# EAGLE board MRCS-RJ45-CMRI-ARRAY (EAGLE 7.7.0)
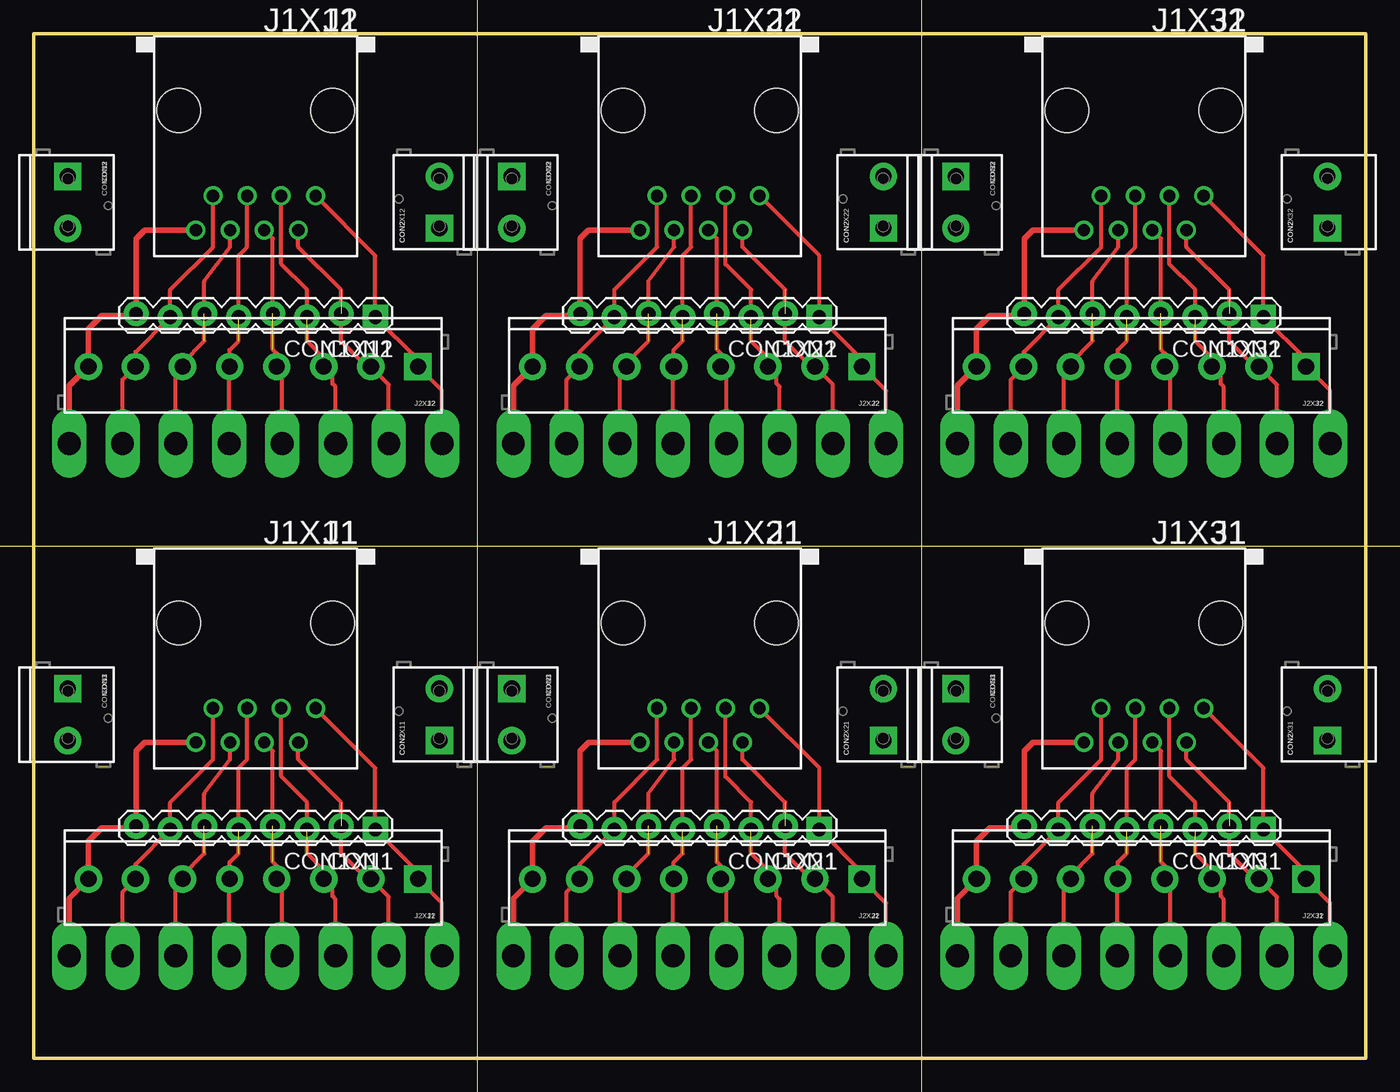
[diagram p0: board, top side]
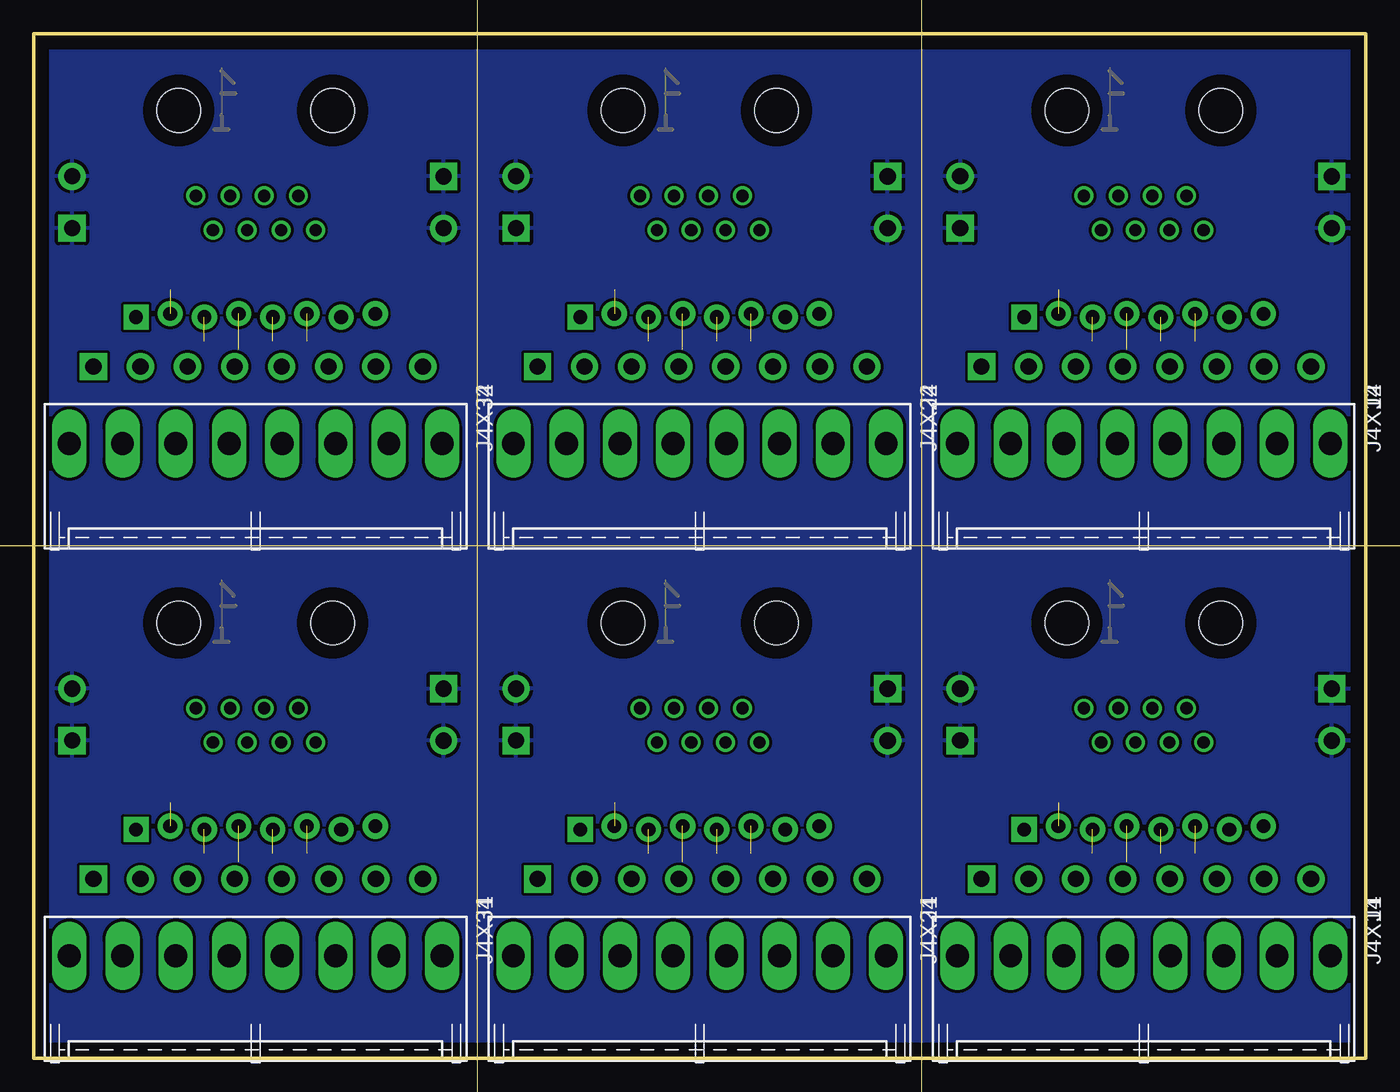
[diagram p1: board, bottom side, seen from below]

Size 99.06 x 76.2 mm. Coordinates in mm from the lower left corner, seen from the top.
Outline: 0,0 99.06,0 99.06,76.2 0,76.2 0,0
Copper layers (1*16): Top 0.035mm / dielectric 1.5mm / Bottom 0.035mm
Design rules "default": minimum track width 10mil, minimum drill 24mil, track to track 8mil, track to pad 8mil, pad to pad 8mil, via to via 8mil, smd to smd 8mil, copper to edge 40mil, drill to drill 8mil, minimum pad ring 10mil, minimum via ring 8mil, stop-mask expansion 4mil, vias tented up to drill 0mil, thermal gap 10mil
Milling: 3 lines

## Footprints (pad centres in the part's own frame; a part is rotated, then mirrored left to right if it is on the bottom)
1X08_LOCK = drill 1.016 pad 1.88 square: 1 0,0.127 | drill 1.016 pad 1.88: 2 2.54,-0.127; 3 5.08,0.127; 4 7.62,-0.127; 5 10.16,0.127; 6 12.7,-0.127; 7 15.24,0.127; 8 17.78,-0.127
SCREWTERMINAL-3.5MM-2_LOCK = drill 1.2 pad 2.032 square: 1 -0.178,0 | drill 1.2 pad 2.032: 2 3.678,0
RJ45-NO-SHIELD = drill 0.9 pad 1.4: 1 -4.445,6.35; 2 -3.175,8.89; 3 -1.905,6.35; 4 -0.635,8.89; 5 0.635,6.35; 6 1.905,8.89; 7 3.175,6.35; 8 4.445,8.89 | hole 3.251: -5.715,0; 5.715,0
SCREWTERMINAL-3.5MM-8 = drill 1.2 pad 2.032 square: 1 0,0 | drill 1.2 pad 2.032: 2 3.5,0; 3 7,0; 4 10.5,0; 5 14,0; 6 17.5,0; 7 21,0; 8 24.5,0
KK-156-8-F = drill 1.7 pad 2.184 long: 1 -13.86,0; 2 -9.9,0; 3 -5.94,0; 4 -1.98,0; 5 1.98,0; 6 5.94,0; 7 9.9,0; 8 13.86,0

## Placement (x,y rotation side)
CON1X11  [1X08_LOCK]  25.4,17.14 180 top
CON1X12  [1X08_LOCK]  25.4,55.24 180 top
CON1X21  [1X08_LOCK]  58.42,17.14 180 top
CON1X22  [1X08_LOCK]  58.42,55.24 180 top
CON1X31  [1X08_LOCK]  91.44,17.14 180 top
CON1X32  [1X08_LOCK]  91.44,55.24 180 top
CON2X11  [SCREWTERMINAL-3.5MM-2_LOCK]  30.16,23.81 90 top
CON2X12  [SCREWTERMINAL-3.5MM-2_LOCK]  30.16,61.91 90 top
CON2X21  [SCREWTERMINAL-3.5MM-2_LOCK]  63.18,23.81 90 top
CON2X22  [SCREWTERMINAL-3.5MM-2_LOCK]  63.18,61.91 90 top
CON2X31  [SCREWTERMINAL-3.5MM-2_LOCK]  96.2,23.81 90 top
CON2X32  [SCREWTERMINAL-3.5MM-2_LOCK]  96.2,61.91 90 top
CON3X11  [SCREWTERMINAL-3.5MM-2_LOCK]  2.54,27.3 270 top
CON3X12  [SCREWTERMINAL-3.5MM-2_LOCK]  2.54,65.41 270 top
CON3X21  [SCREWTERMINAL-3.5MM-2_LOCK]  35.56,27.3 270 top
CON3X22  [SCREWTERMINAL-3.5MM-2_LOCK]  35.56,65.41 270 top
CON3X31  [SCREWTERMINAL-3.5MM-2_LOCK]  68.58,27.3 270 top
CON3X32  [SCREWTERMINAL-3.5MM-2_LOCK]  68.58,65.41 270 top
J1X11  [RJ45-NO-SHIELD]  16.51,32.38 180 top
J1X12  [RJ45-NO-SHIELD]  16.51,70.48 180 top
J1X21  [RJ45-NO-SHIELD]  49.53,32.38 180 top
J1X22  [RJ45-NO-SHIELD]  49.53,70.48 180 top
J1X31  [RJ45-NO-SHIELD]  82.55,32.38 180 top
J1X32  [RJ45-NO-SHIELD]  82.55,70.48 180 top
J2X11  [SCREWTERMINAL-3.5MM-8]  28.57,13.34 180 top
J2X12  [SCREWTERMINAL-3.5MM-8]  28.57,51.44 180 top
J2X21  [SCREWTERMINAL-3.5MM-8]  61.59,13.34 180 top
J2X22  [SCREWTERMINAL-3.5MM-8]  61.59,51.44 180 top
J2X31  [SCREWTERMINAL-3.5MM-8]  94.61,13.34 180 top
J2X32  [SCREWTERMINAL-3.5MM-8]  94.61,51.44 180 top
J4X11  [KK-156-8-F]  16.51,7.62 180 bottom
J4X12  [KK-156-8-F]  16.51,45.72 180 bottom
J4X21  [KK-156-8-F]  49.53,7.62 180 bottom
J4X22  [KK-156-8-F]  49.53,45.72 180 bottom
J4X31  [KK-156-8-F]  82.55,7.62 180 bottom
J4X32  [KK-156-8-F]  82.55,45.72 180 bottom
U$1X11  [MRCSLOGOBTM]  12.7,30.48 0 top
U$1X12  [MRCSLOGOBTM]  12.7,68.58 0 top
U$1X21  [MRCSLOGOBTM]  45.72,30.48 0 top
U$1X22  [MRCSLOGOBTM]  45.72,68.58 0 top
U$1X31  [MRCSLOGOBTM]  78.74,30.48 0 top
U$1X32  [MRCSLOGOBTM]  78.74,68.58 0 top

## Library data of the parts
CON1X11 CON1X12 CON1X21 CON1X22 CON1X31 CON1X32 CON2X11 CON2X12 CON2X21 CON2X22 CON2X31 CON2X32 CON3X11 CON3X12 CON3X21 CON3X22 CON3X31 CON3X32 J1X11 J1X12 J1X21 J1X22 J1X31 J1X32 J2X11 J2X12 J2X21 J2X22 J2X31 J2X32 J4X11 J4X12 J4X21 J4X22 J4X31 J4X32 = SPCoast
U$1X11 U$1X12 U$1X21 U$1X22 U$1X31 U$1X32 = MRCSLogoBtm

## Nets
GNDX11: CON2X11.1 CON2X11.2 CON3X11.1 CON3X11.2
GNDX12: CON2X12.1 CON2X12.2 CON3X12.1 CON3X12.2
GNDX21: CON2X21.1 CON2X21.2 CON3X21.1 CON3X21.2
GNDX22: CON2X22.1 CON2X22.2 CON3X22.1 CON3X22.2
GNDX31: CON2X31.1 CON2X31.2 CON3X31.1 CON3X31.2
GNDX32: CON2X32.1 CON2X32.2 CON3X32.1 CON3X32.2
L1X11: CON1X11.1 J1X11.1 J2X11.1 J4X11.8
L1X12: CON1X12.1 J1X12.1 J2X12.1 J4X12.8
L1X21: CON1X21.1 J1X21.1 J2X21.1 J4X21.8
L1X22: CON1X22.1 J1X22.1 J2X22.1 J4X22.8
L1X31: CON1X31.1 J1X31.1 J2X31.1 J4X31.8
L1X32: CON1X32.1 J1X32.1 J2X32.1 J4X32.8
L2X11: CON1X11.2 J1X11.2 J2X11.2 J4X11.7
L2X12: CON1X12.2 J1X12.2 J2X12.2 J4X12.7
L2X21: CON1X21.2 J1X21.2 J2X21.2 J4X21.7
L2X22: CON1X22.2 J1X22.2 J2X22.2 J4X22.7
L2X31: CON1X31.2 J1X31.2 J2X31.2 J4X31.7
L2X32: CON1X32.2 J1X32.2 J2X32.2 J4X32.7
L3X11: CON1X11.3 J1X11.3 J2X11.3 J4X11.6
L3X12: CON1X12.3 J1X12.3 J2X12.3 J4X12.6
L3X21: CON1X21.3 J1X21.3 J2X21.3 J4X21.6
L3X22: CON1X22.3 J1X22.3 J2X22.3 J4X22.6
L3X31: CON1X31.3 J1X31.3 J2X31.3 J4X31.6
L3X32: CON1X32.3 J1X32.3 J2X32.3 J4X32.6
L4X11: CON1X11.4 J1X11.4 J2X11.4 J4X11.5
L4X12: CON1X12.4 J1X12.4 J2X12.4 J4X12.5
L4X21: CON1X21.4 J1X21.4 J2X21.4 J4X21.5
L4X22: CON1X22.4 J1X22.4 J2X22.4 J4X22.5
L4X31: CON1X31.4 J1X31.4 J2X31.4 J4X31.5
L4X32: CON1X32.4 J1X32.4 J2X32.4 J4X32.5
L5X11: CON1X11.5 J1X11.5 J2X11.5 J4X11.4
L5X12: CON1X12.5 J1X12.5 J2X12.5 J4X12.4
L5X21: CON1X21.5 J1X21.5 J2X21.5 J4X21.4
L5X22: CON1X22.5 J1X22.5 J2X22.5 J4X22.4
L5X31: CON1X31.5 J1X31.5 J2X31.5 J4X31.4
L5X32: CON1X32.5 J1X32.5 J2X32.5 J4X32.4
L6X11: CON1X11.6 J1X11.6 J2X11.6 J4X11.3
L6X12: CON1X12.6 J1X12.6 J2X12.6 J4X12.3
L6X21: CON1X21.6 J1X21.6 J2X21.6 J4X21.3
L6X22: CON1X22.6 J1X22.6 J2X22.6 J4X22.3
L6X31: CON1X31.6 J1X31.6 J2X31.6 J4X31.3
L6X32: CON1X32.6 J1X32.6 J2X32.6 J4X32.3
L7X11: CON1X11.7 J1X11.7 J2X11.7 J4X11.2
L7X12: CON1X12.7 J1X12.7 J2X12.7 J4X12.2
L7X21: CON1X21.7 J1X21.7 J2X21.7 J4X21.2
L7X22: CON1X22.7 J1X22.7 J2X22.7 J4X22.2
L7X31: CON1X31.7 J1X31.7 J2X31.7 J4X31.2
L7X32: CON1X32.7 J1X32.7 J2X32.7 J4X32.2
L8X11: CON1X11.8 J1X11.8 J2X11.8 J4X11.1
L8X12: CON1X12.8 J1X12.8 J2X12.8 J4X12.1
L8X21: CON1X21.8 J1X21.8 J2X21.8 J4X21.1
L8X22: CON1X22.8 J1X22.8 J2X22.8 J4X22.1
L8X31: CON1X31.8 J1X31.8 J2X31.8 J4X31.1
L8X32: CON1X32.8 J1X32.8 J2X32.8 J4X32.1

## Tracks (layer width: path | path; a pad name or v marks a point on that pad's centre or on a via)
GNDX11
  pour Bottom: 0,0 33.02,0 33.02,38.1 0,38.1
GNDX12
  pour Bottom: 0,38.1 33.02,38.1 33.02,76.2 0,76.2
GNDX21
  pour Bottom: 33.02,0 66.04,0 66.04,38.1 33.02,38.1
GNDX22
  pour Bottom: 33.02,38.1 66.04,38.1 66.04,76.2 33.02,76.2
GNDX31
  pour Bottom: 66.04,0 99.06,0 99.06,38.1 66.04,38.1
GNDX32
  pour Bottom: 66.04,38.1 99.06,38.1 99.06,76.2 66.04,76.2
L1X11
  Top 0.305: J4X11.8 30.37,11.54 J2X11.1 28.57,13.84 CON1X11.1 25.4,21.59 J1X11.1
L1X12
  Top 0.305: J4X12.8 30.37,49.64 J2X12.1 28.57,51.94 CON1X12.1 25.4,59.69 J1X12.1
L1X21
  Top 0.305: J4X21.8 63.39,11.54 J2X21.1 61.59,13.84 CON1X21.1 58.42,21.59 J1X21.1
L1X22
  Top 0.305: J4X22.8 63.39,49.64 J2X22.1 61.59,51.94 CON1X22.1 58.42,59.69 J1X22.1
L1X31
  Top 0.305: J4X31.8 96.41,11.54 J2X31.1 94.61,13.84 CON1X31.1 91.44,21.59 J1X31.1
L1X32
  Top 0.305: J4X32.8 96.41,49.64 J2X32.1 94.61,51.94 CON1X32.1 91.44,59.69 J1X32.1
L2X11  (1 unrouted)
  Top 0.305: J4X11.7 26.41,12 J2X11.2 24.77,13.34 22.86,15.24 22.86,19.05 19.68,22.23 J1X11.2
L2X12  (1 unrouted)
  Top 0.305: J4X12.7 26.41,50.1 J2X12.2 24.77,51.44 22.86,53.34 22.86,57.15 19.68,60.33 J1X12.2
L2X21  (1 unrouted)
  Top 0.305: J4X21.7 59.43,12 J2X21.2 57.78,13.34 55.88,15.24 55.88,19.05 52.7,22.23 J1X21.2
L2X22  (1 unrouted)
  Top 0.305: J4X22.7 59.43,50.1 J2X22.2 57.78,51.44 55.88,53.34 55.88,57.15 52.7,60.33 J1X22.2
L2X31  (1 unrouted)
  Top 0.305: J4X31.7 92.45,12 J2X31.2 90.81,13.34 88.9,15.24 88.9,19.05 85.72,22.23 J1X31.2
L2X32  (1 unrouted)
  Top 0.305: J4X32.7 92.45,50.1 J2X32.2 90.81,51.44 88.9,53.34 88.9,57.15 85.72,60.33 J1X32.2
L3X11  (1 unrouted)
  Top 0.305: J4X11.6 22.45,11.84 22.23,12.06 22.23,12.69 J2X11.3 21.57,13.98 20.32,15.24 20.32,19.05 18.41,20.95 J1X11.3
L3X12  (1 unrouted)
  Top 0.305: J4X12.6 22.45,49.94 22.23,50.16 22.23,50.78 J2X12.3 21.57,52.09 20.32,53.34 20.32,57.15 18.41,59.05 J1X12.3
L3X21  (1 unrouted)
  Top 0.305: J4X21.6 55.47,11.84 55.24,12.06 55.24,12.69 J2X21.3 54.59,13.98 53.34,15.24 53.34,19.05 51.44,20.95 J1X21.3
L3X22  (1 unrouted)
  Top 0.305: J4X22.6 55.47,49.94 55.24,50.16 55.24,50.78 J2X22.3 54.59,52.09 53.34,53.34 53.34,57.15 51.44,59.05 J1X22.3
L3X31  (1 unrouted)
  Top 0.305: J4X31.6 88.49,11.84 88.27,12.06 88.27,12.69 J2X31.3 87.61,13.98 86.36,15.24 86.36,19.05 84.45,20.95 J1X31.3
L3X32  (1 unrouted)
  Top 0.305: J4X32.6 88.49,49.94 88.27,50.16 88.27,50.78 J2X32.3 87.61,52.09 86.36,53.34 86.36,57.15 84.45,59.05 J1X32.3
L4X11  (1 unrouted)
  Top 0.305: J4X11.5 18.49,12.92 J2X11.4 18.07,14.31 17.78,14.61 17.78,22.86 J1X11.4
L4X12  (1 unrouted)
  Top 0.305: J4X12.5 18.49,51.02 J2X12.4 18.07,52.41 17.78,52.7 17.78,60.96 J1X12.4
L4X21  (1 unrouted)
  Top 0.305: J4X21.5 51.51,12.92 J2X21.4 51.09,14.31 50.8,14.61 50.8,22.86 J1X21.4
L4X22  (1 unrouted)
  Top 0.305: J4X22.5 51.51,51.02 J2X22.4 51.09,52.41 50.8,52.7 50.8,60.96 J1X22.4
L4X31  (1 unrouted)
  Top 0.305: J4X31.5 84.53,12.92 J2X31.4 84.11,14.31 83.82,14.61 83.82,22.86 J1X31.4
L4X32  (1 unrouted)
  Top 0.305: J4X32.5 84.53,51.02 J2X32.4 84.11,52.41 83.82,52.7 83.82,60.96 J1X32.4
L5X11  (1 unrouted)
  Top 0.305: J4X11.4 14.53,13.29 J2X11.5 14.57,14.57 15.24,15.24 15.24,21.59 15.88,22.23 J1X11.5
L5X12  (1 unrouted)
  Top 0.305: J4X12.4 14.53,51.39 J2X12.5 14.57,52.67 15.24,53.34 15.24,59.69 15.88,60.33 J1X12.5
L5X21  (1 unrouted)
  Top 0.305: J4X21.4 47.55,13.29 J2X21.5 47.59,14.57 48.26,15.24 48.26,21.59 48.9,22.23 J1X21.5
L5X22  (1 unrouted)
  Top 0.305: J4X22.4 47.55,51.39 J2X22.5 47.59,52.67 48.26,53.34 48.26,59.69 48.9,60.33 J1X22.5
L5X31  (1 unrouted)
  Top 0.305: J4X31.4 80.57,13.29 J2X31.5 80.61,14.57 81.28,15.24 81.28,21.59 81.92,22.23 J1X31.5
L5X32  (1 unrouted)
  Top 0.305: J4X32.4 80.57,51.39 J2X32.5 80.61,52.67 81.28,53.34 81.28,59.69 81.92,60.33 J1X32.5
L6X11  (1 unrouted)
  Top 0.305: J4X11.3 10.57,12.83 J2X11.6 11.07,13.62 12.7,15.24 12.7,19.68 14.61,22.23 J1X11.6
L6X12  (1 unrouted)
  Top 0.305: J4X12.3 10.57,50.93 J2X12.6 11.07,51.72 12.7,53.34 12.7,57.78 14.61,60.33 J1X12.6
L6X21  (1 unrouted)
  Top 0.305: J4X21.3 43.59,12.83 J2X21.6 44.09,13.62 45.72,15.24 45.72,19.68 47.62,22.23 J1X21.6
L6X22  (1 unrouted)
  Top 0.305: J4X22.3 43.59,50.93 J2X22.6 44.09,51.72 45.72,53.34 45.72,57.78 47.62,60.33 J1X22.6
L6X31  (1 unrouted)
  Top 0.305: J4X31.3 76.61,12.83 J2X31.6 77.11,13.62 78.74,15.24 78.74,19.68 80.64,22.23 J1X31.6
L6X32  (1 unrouted)
  Top 0.305: J4X32.3 76.61,50.93 J2X32.6 77.11,51.72 78.74,53.34 78.74,57.78 80.64,60.33 J1X32.6
L7X11
  Top 0.305: J4X11.2 6.61,12.37 J2X11.7 7.58,14.43 CON1X11.7 10.16,19.05 13.34,22.23 J1X11.7
L7X12
  Top 0.305: J4X12.2 6.61,50.47 J2X12.7 7.58,52.53 CON1X12.7 10.16,57.15 13.34,60.33 J1X12.7
L7X21
  Top 0.305: J4X21.2 39.63,12.37 J2X21.7 40.59,14.43 CON1X21.7 43.18,19.05 46.35,22.23 J1X21.7
L7X22
  Top 0.305: J4X22.2 39.63,50.47 J2X22.7 40.59,52.53 CON1X22.7 43.18,57.15 46.35,60.33 J1X22.7
L7X31
  Top 0.305: J4X31.2 72.65,12.37 J2X31.7 73.61,14.43 CON1X31.7 76.2,19.05 79.38,22.23 J1X31.7
L7X32
  Top 0.305: J4X32.2 72.65,50.47 J2X32.7 73.61,52.53 CON1X32.7 76.2,57.15 79.38,60.33 J1X32.7
L8X11
  Top 0.305: 11.43,23.5 J1X11.8
  Top 0.406: J4X11.1 2.65,11.91 J2X11.8 4.08,16.14 5.08,17.14 7.49,17.14 CON1X11.8 7.62,22.86 8.26,23.5 J1X11.8
L8X12
  Top 0.305: 11.43,61.59 J1X12.8
  Top 0.406: J4X12.1 2.65,50.01 J2X12.8 4.08,54.24 5.08,55.24 7.49,55.24 CON1X12.8 7.62,60.96 8.26,61.59 J1X12.8
L8X21
  Top 0.305: 44.45,23.5 J1X21.8
  Top 0.406: J4X21.1 35.67,11.91 J2X21.8 37.09,16.14 38.1,17.14 40.51,17.14 CON1X21.8 40.64,22.86 41.27,23.5 J1X21.8
L8X22
  Top 0.305: 44.45,61.59 J1X22.8
  Top 0.406: J4X22.1 35.67,50.01 J2X22.8 37.09,54.24 38.1,55.24 40.51,55.24 CON1X22.8 40.64,60.96 41.27,61.59 J1X22.8
L8X31
  Top 0.305: 77.47,23.5 J1X31.8
  Top 0.406: J4X31.1 68.69,11.91 J2X31.8 70.11,16.14 71.12,17.14 73.53,17.14 CON1X31.8 73.66,22.86 74.3,23.5 J1X31.8
L8X32
  Top 0.305: 77.47,61.59 J1X32.8
  Top 0.406: J4X32.1 68.69,50.01 J2X32.8 70.11,54.24 71.12,55.24 73.53,55.24 CON1X32.8 73.66,60.96 74.3,61.59 J1X32.8

## Text on the board
Milling: V-Score | V-Score | V-Score
tDocu: J1 | J1 | J1 | GND | GND | GND | GND | GND | GND | CON3 | CON3 | CON3 | CON2 | CON2 | CON2 | CMRI-RJ | 2023.09 | CMRI-RJ | 2023.09 | CMRI-RJ | 2023.09 | CON1 | CON1 | CON1 | J2 | J2 | J2 | J1 | J1 | J1 | GND | GND | GND | GND | GND | GND | CON3 | CON3 | CON3 | CON2 | CON2 | CON2 | CMRI-RJ | 2023.09 | CMRI-RJ | 2023.09 | CMRI-RJ | 2023.09 | CON1 | CON1 | CON1 | J2 | J2 | J2
bDocu: J4 | J4 | J4 | J4 | J4 | J4
_tNames: J1 | J1 | J1 | CON3 | CON3 | CON3 | CON2 | CON2 | CON2 | CON1 | CON1 | CON1 | J2 | J2 | J2 | J1 | J1 | J1 | CON3 | CON3 | CON3 | CON2 | CON2 | CON2 | CON1 | CON1 | CON1 | J2 | J2 | J2
_bNames: J4 | J4 | J4 | J4 | J4 | J4